# Altium PCB PowerAmplifier_Control.PcbDoc
Units mm, origin at the board's own origin, x right, y up, seen from the top; angles counter-clockwise.
Board outline 99.95 x 150.11 mm, 2 copper layers (Top Layer, Bottom Layer); 61 components, 90 nets, 316 pads, 0 vias.
Unrouted connection lines stored in the file: 173.
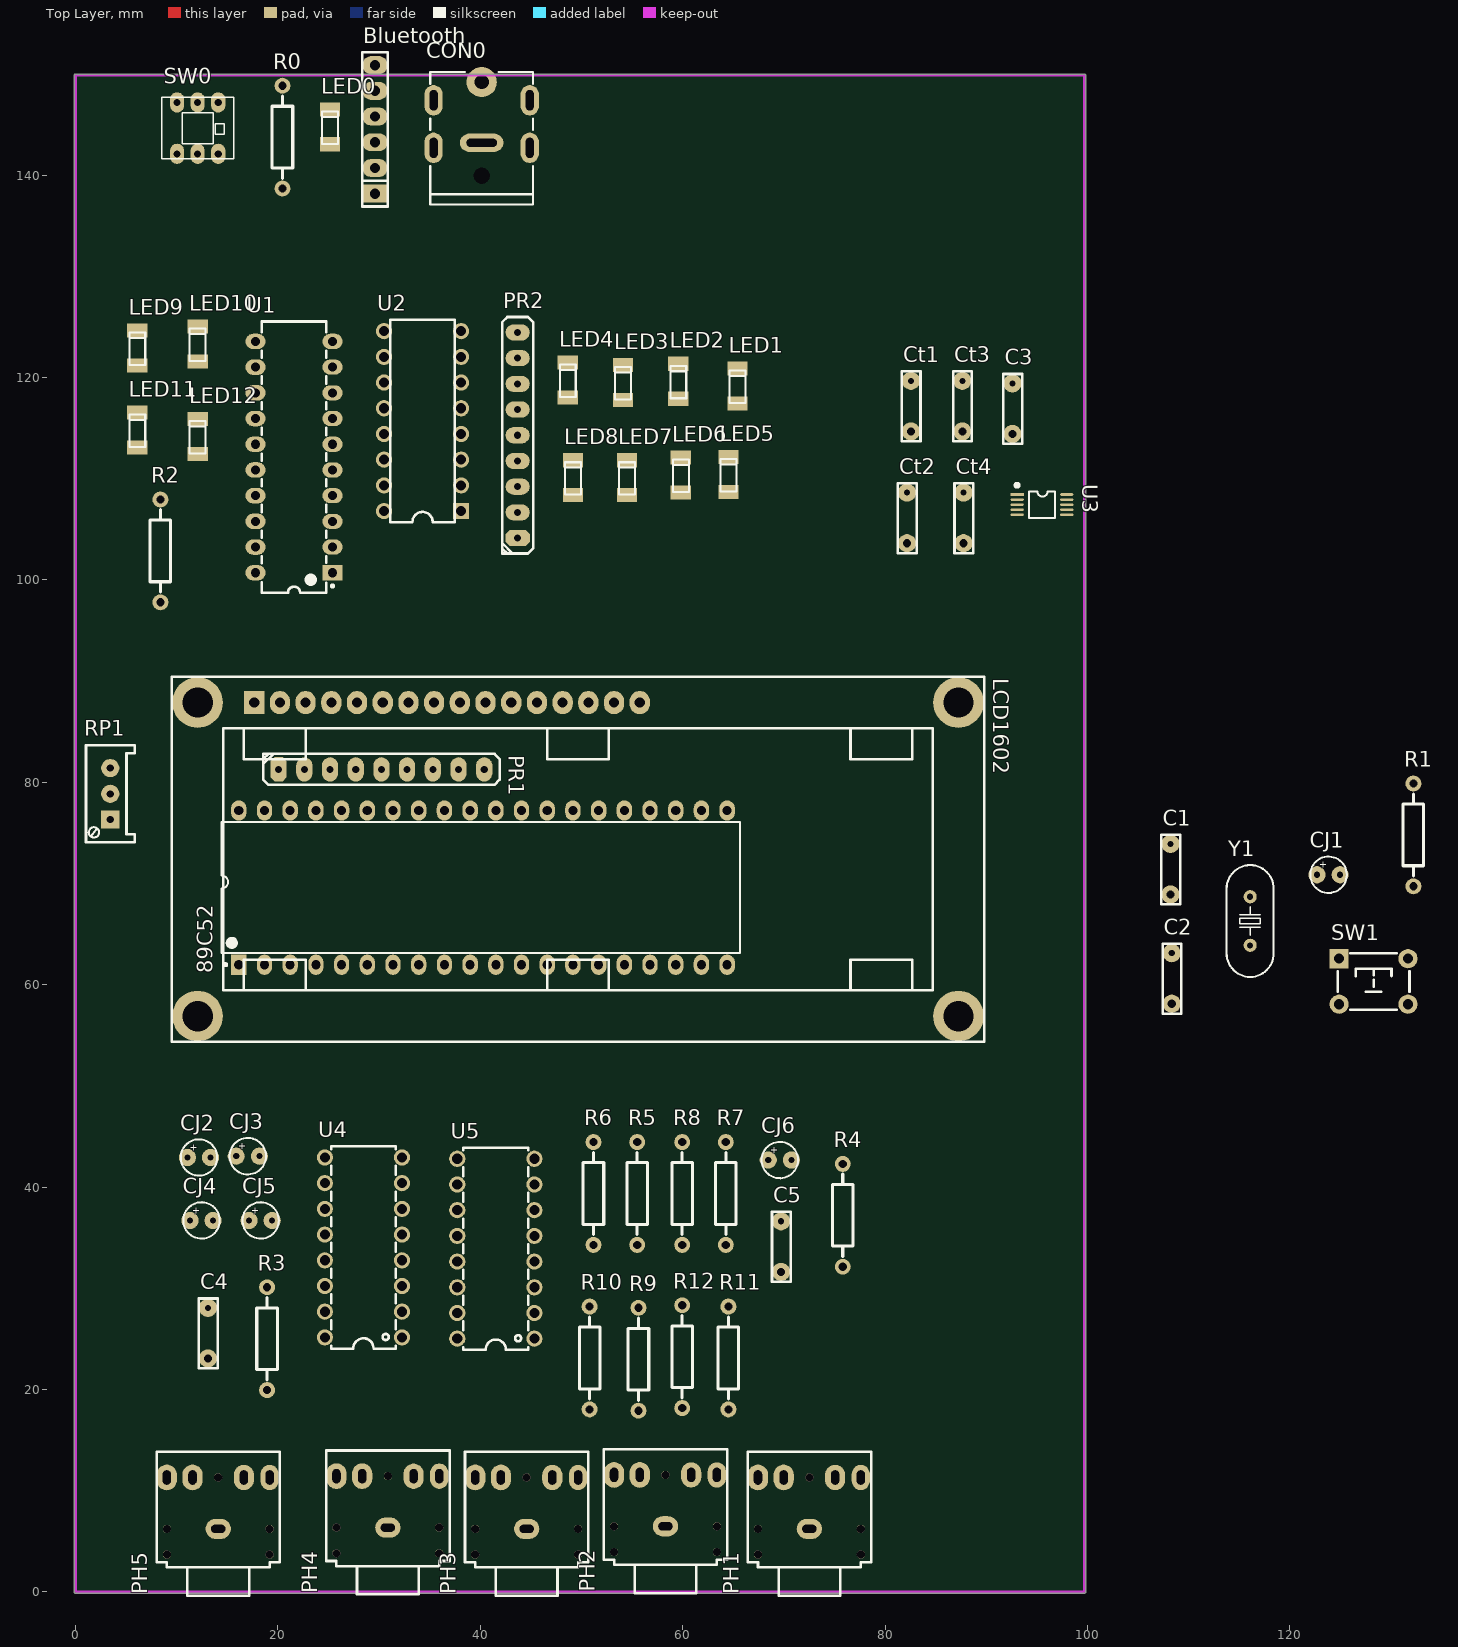
[diagram p0: Top Layer view]
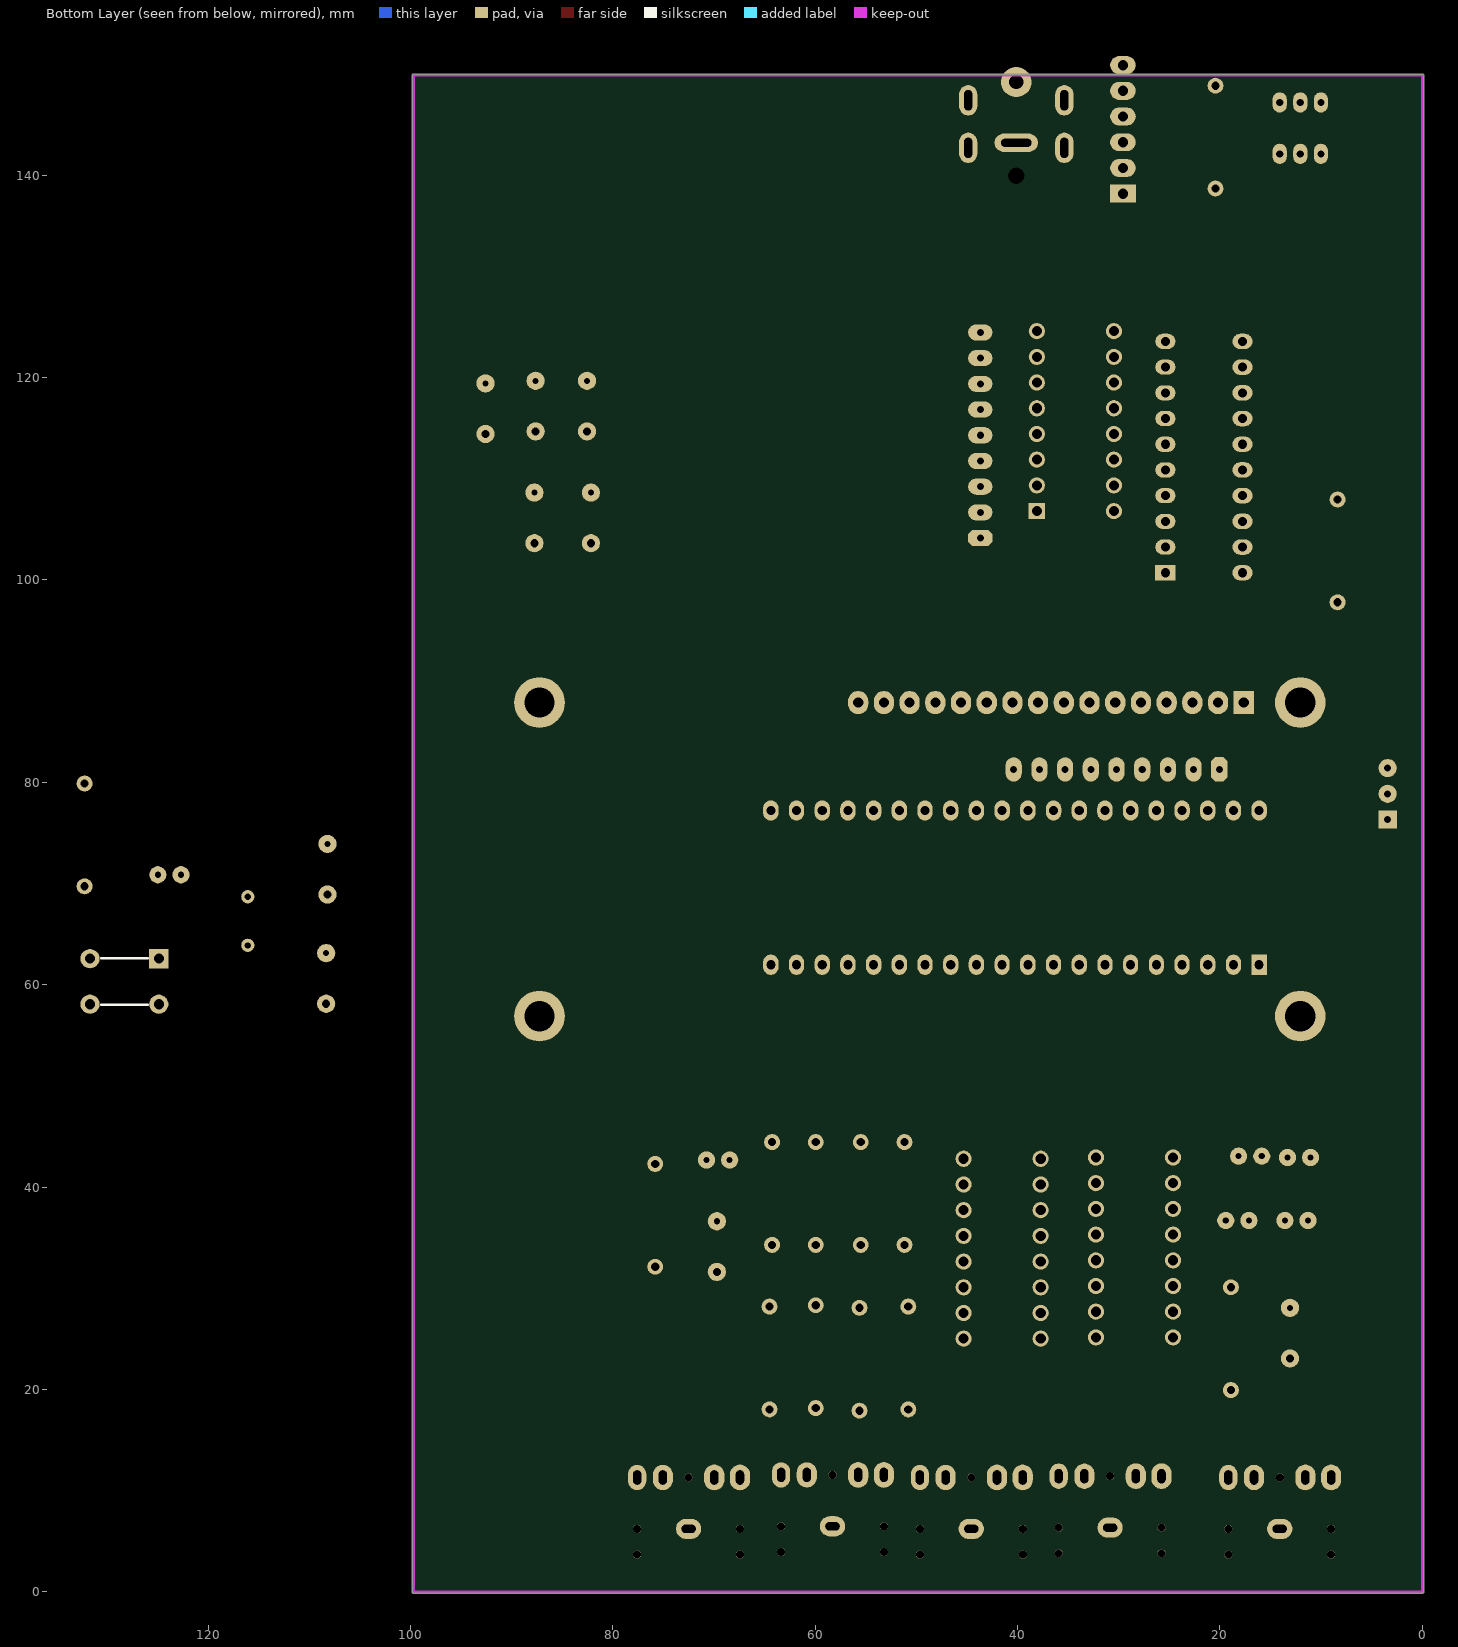
[diagram p1: Bottom Layer view, seen from below]

## Layer stack, top to bottom
Top Solder: solder mask 0.0102, Solder Resist, Dk 3.5
Top Layer: signal copper 0.0356
Dielectric 1: dielectric 0.32, FR-4, Dk 4.8
Bottom Layer: signal copper 0.0356
Bottom Solder: solder mask 0.0102, Solder Resist, Dk 3.5

## Board outline
0,-0.127 cw(c0,0) -0.127,0 -0.127,149.86 cw(c0,149.86) 0,149.987 99.695,149.987 cw(c99.695,149.86) 99.822,149.86 99.822,0 cw(c99.695,0) 99.695,-0.127

## Design rules (kind name [scope] priority, off if disabled: settings)
Clearance [All] p1: gap=0.254
PolygonConnect [All] p1: connectstyle=Relief reliefconductorwidth=0.254 reliefentries=4 polygonreliefangle="90 Angle" airgapwidth=0.254
RoutingVias [All] p1: holewidth=0.711 width=1.27 viastyle="Through Hole" minholewidth=0.711 minwidth=1.27 maxholewidth=0.711 maxwidth=1.27
SolderMaskExpansion [All] p1: expansion=0.102
Width [All] p1: maxlimit=0.254 minlimit=0.254 preferedwidth=0.254
30 further rules are at their usual default settings.

## Components (designator, comment, footprint, x,y, rotation, side; value= is the part's Value field where it differs from the comment)
89C52 "STC89C52RC-40I" DIP-40_LS15.24-L52.58-W13.97-PITCH2.54 40.259,69.596 r90 top
Bluetooth "HEADER1" sip-6 29.591,138.176 r90 top
C1 "30pf" CAP2 108.204,68.914 r90 top
C2 "30pf" CAP2 108.331,58.119 r90 top
C3 "0.1uf" CAP2 92.583,114.427 r90 top
C4 "30pf" CAP2 13.081,23.067 r90 top
C5 "30pf" CAP2 69.723,31.623 r90 top
CJ1 "10uf" CAO1 123.825,70.866 r0 top
CJ2 "22uf" CAO1 12.192,42.926 r0 top
CJ3 "22uf" CAO1 17.018,43.053 r0 top
CJ4 "22uf" CAO1 12.446,36.703 r0 top
CJ5 "22uf" CAO1 18.288,36.703 r0 top
CJ6 "22uf" CAO1 69.596,42.672 r0 top
CON0 "5.5*2.1" DC-005P 40.132,143.704 r0 top
Ct1 "22uf" CAP2 82.55,114.681 r90 top
Ct2 "22uf" CAP2 82.169,103.632 r90 top
Ct3 "22uf" CAP2 87.63,114.681 r90 top
Ct4 "22uf" CAP2 87.757,103.632 r90 top
LCD1602 "1602" 1602 17.653,87.884 r0 top
LED0 "LED_R" LED_1206 25.146,144.78 r90 top
LED1 "LED_R" LED_1206 65.405,119.177 r90 top
LED2 "LED_R" LED_1206 59.563,119.634 r90 top
LED3 "LED_R" LED_1206 54.102,119.507 r90 top
LED4 "LED_R" LED_1206 48.641,119.761 r90 top
LED5 "LED_R" LED_1206 64.516,110.414 r90 top
LED6 "LED_R" LED_1206 59.817,110.363 r90 top
LED7 "LED_R" LED_1206 54.483,110.109 r90 top
LED8 "LED_R" LED_1206 49.149,110.109 r90 top
LED9 "LED_R" LED_1206 6.096,122.936 r90 top
LED10 "LED_R" LED_1206 12.065,123.317 r90 top
LED11 "LED_R" LED_1206 6.096,114.808 r90 top
LED12 "LED_R" LED_1206 12.065,114.173 r90 top
PH1 "POHENJACK STEREO SW" "POHENJACK STEREO SW" 72.39,8.636 r90 top
PH2 "POHENJACK STEREO SW" "POHENJACK STEREO SW" 58.166,8.89 r90 top
PH3 "POHENJACK STEREO SW" "POHENJACK STEREO SW" 44.45,8.636 r90 top
PH4 "POHENJACK STEREO SW" "POHENJACK STEREO SW" 30.734,8.763 r90 top
PH5 "POHENJACK STEREO SW" "POHENJACK STEREO SW" 13.97,8.636 r90 top
PR1 "10k" RP1 20.066,81.28 r0 top
PR2 "1k" RP1 43.688,104.14 r90 top
R0 "10k" AXIAL0.4 20.447,138.684 r90 top
R1 "10k" AXIAL0.4 132.207,69.723 r90 top
R2 "3.3k" AXIAL0.4 8.382,97.79 r90 top
R3 "10k" AXIAL0.4 18.923,19.939 r90 top
R4 "10k" AXIAL0.4 75.819,32.131 r90 top
R5 "51" AXIAL0.4 55.499,34.29 r90 top
R6 "220" AXIAL0.4 51.181,34.29 r90 top
R7 "680" AXIAL0.4 64.262,34.29 r90 top
R8 "1k" AXIAL0.4 59.944,34.29 r90 top
R9 "3.3k" AXIAL0.4 55.626,17.907 r90 top
R10 "6.8k" AXIAL0.4 50.8,18.034 r90 top
R11 "15k" AXIAL0.4 64.516,18.034 r90 top
R12 "27k" AXIAL0.4 59.944,18.161 r90 top
RP1 "10k" 3296W 3.429,78.867 r90 top
SW0 "SW-DPDT" SWH7*7 10.033,147.193 r0 top
SW1 "6x6x5" "TSW DIP-6*6*6" 128.27,60.325 r0 top
U1 "SN74HC573AN" DIP-20_L26.8-W6.4-P2.54-LS7.6-BL 21.59,112.141 r90 top
U2 "SN74HC595N" DIP-16_L19.8-W6.5-P2.54-LS7.6-BL 34.29,115.697 r90 top
U3 "BS814A-1" MSOP10_N 95.504,107.442 r270 top
U4 "CD4051BE" DIP-16_L20.0-W6.4-P2.54-LS7.6-BL 28.448,34.036 r90 top
U5 "CD4051BE" DIP-16_L20.0-W6.4-P2.54-LS7.6-BL 41.529,33.909 r90 top
Y1 "11.0592MHz" "OSC HC-49S" 116.078,66.294 r90 top

## Footprints (in the part's own frame and the unit in brackets; to place one, negate y for a bottom-side part, rotate by r counter-clockwise, add the part's x,y. Pads: shape width x height; smd on the part's side, far side on the other; paste and mask are expansions set on the pad)
1602 [mm]
  round 5 hole 3: 0(-5.588,-30.988) 0(-5.588,0) 0(69.596,-30.988) 0(69.596,0)
  rect 2x2.3 hole 1: 1(0,0)
  oval 2x2.3 hole 1: 2(2.54,0) 3(5.08,0) 4(7.62,0) 5(10.16,0) 6(12.7,0) 7(15.24,0) 8(17.78,0) 9(20.32,0) 10(22.86,0) 11(25.4,0) 12(27.94,0) 13(30.48,0) 14(33.02,0) 15(35.56,0) 16(38.1,0)
  silkscreen extent -8.13,-33.53 72.14,2.54
3296W [mm] "Precise Multi-Winding Adjustable Resistor"
  rect 1.8x1.8 hole 0.7: 1(-2.54,0)
  round 1.8 hole 0.7: 2(0,0) 3(2.54,0)
  silkscreen extent -4.8,-2.4 4.8,2.4, body extent -4.75,-2.4 4.75,2.4, height 11.52
AXIAL0.4 [mil]
  round 62 hole 32: 1(0,0) 2(400,0)
  silkscreen extent 40,-40 360,40
CAO1 [mm]
  round 1.7 hole 0.6: 1(-1.143,0) 2(1.143,0)
  silkscreen extent -1.8,-1.8 1.8,1.8
CAP2 [mm]
  round 1.8 hole 0.8: 1(0,0)
  round 1.8 hole 0.6: 2(5,0)
  silkscreen extent -0.98,-0.95 5.93,0.9
DC-005P [mm] "13mm*10mm*10mm(长*宽*高)"
  oval 1.8x3 hole 0.8 slot 2 at 90 deg unplated: 0(-4.75,-1) 0(-4.75,3.7) 0(4.75,-1) 0(4.75,3.7)
  round 3 hole 1.4 unplated: 1(0,5.5)
  oval 4.3x1.8 hole 0.8 slot 3 at 0 deg unplated: 2(0,-0.5)
  round 0 hole 1.6 unplated: 4(0,-3.75)
  silkscreen extent -5.08,-6.6 5.08,6.48, body extent -5,-6.5 5,6.3, height 10.15
DIP-16_L19.8-W6.5-P2.54-LS7.6-BL [mm]
  rect 1.6x1.6 hole 1: 1(-8.89,-3.81)
  round 1.6 hole 1: 2(-6.35,-3.81) 3(-3.81,-3.81) 4(-1.27,-3.81) 5(1.27,-3.81) 6(3.81,-3.81) 7(6.35,-3.81) 8(8.89,-3.81) 9(8.89,3.81) 10(6.35,3.81) 11(3.81,3.81) 12(1.27,3.81) 13(-1.27,3.81) 14(-3.81,3.81) 15(-6.35,3.81) 16(-8.89,3.81)
  silkscreen extent -10,-3.2 10,3.2
DIP-16_L20.0-W6.4-P2.54-LS7.6-BL [mm]
  round 1.6 hole 1: 1(-8.89,-3.81) 2(-6.35,-3.81) 3(-3.81,-3.81) 4(-1.27,-3.81) 5(1.27,-3.81) 6(3.81,-3.81) 7(6.35,-3.81) 8(8.89,-3.81) 9(8.89,3.81) 10(6.35,3.81) 11(3.81,3.81) 12(1.27,3.81) 13(-1.27,3.81) 14(-3.81,3.81) 15(-6.35,3.81) 16(-8.89,3.81)
  silkscreen extent -10,-3.2 10,3.2
DIP-20_L26.8-W6.4-P2.54-LS7.6-BL [mm]
  rect 1.5x2 hole 0.9: 1(-11.43,-3.81)
  oval 1.5x1.999 hole 0.9: 2(-8.89,-3.81) 3(-6.35,-3.81) 4(-3.81,-3.81) 5(-1.27,-3.81) 6(1.27,-3.81) 7(3.81,-3.81) 8(6.35,-3.81) 9(8.89,-3.81)
  oval 1.524x2 hole 0.9: 10(11.43,-3.81) 11(11.43,3.81) 12(8.89,3.81) 13(6.35,3.81) 14(3.81,3.81) 15(1.27,3.81) 16(-1.27,3.81) 17(-3.81,3.81) 18(-6.35,3.81) 19(-8.89,3.81) 20(-11.43,3.81)
  silkscreen extent -13.4,-3.93 13.4,3.2
DIP-40_LS15.24-L52.58-W13.97-PITCH2.54 [mm]
  rect 2x1.5 hole 0.9: 1(-7.62,24.13)
  oval 1.999x1.5 hole 0.9: 2(-7.62,21.59) 3(-7.62,19.05) 4(-7.62,16.51) 5(-7.62,13.97) 6(-7.62,11.43) 7(-7.62,8.89) 8(-7.62,6.35) 9(-7.62,3.81) 11(-7.62,-1.27)
  oval 2x1.524 hole 0.9: 10(-7.62,1.27) 12(-7.62,-3.81) 13(-7.62,-6.35) 14(-7.62,-8.89) 15(-7.62,-11.43) 16(-7.62,-13.97) 17(-7.62,-16.51) 18(-7.62,-19.05) 19(-7.62,-21.59) 20(-7.62,-24.13) 21(7.62,-24.13) 22(7.62,-21.59) 23(7.62,-19.05) 24(7.62,-16.51) 25(7.62,-13.97) 26(7.62,-11.43) 27(7.62,-8.89) 28(7.62,-6.35) 29(7.62,-3.81) 30(7.62,-1.27) 31(7.62,1.27) 32(7.62,3.81) 33(7.62,6.35) 34(7.62,8.89) 35(7.62,11.43) 36(7.62,13.97) 37(7.62,16.51) 38(7.62,19.05) 39(7.62,21.59) 40(7.62,24.13)
  silkscreen extent -7.74,-25.42 6.48,25.82
LED_1206 [mm]
  rect 1.4x2 smd: 1(-1.727,0) 2(1.727,0)
  silkscreen extent -1.68,-0.79 1.52,0.79, body extent -1.65,-0.79 1.55,0.81, height 1.11
MSOP10_N [mm] "塑封体长3mm，宽3mm，脚距0.5"
  rect 0.26x1.3 smd: 1(-1,-2.45)
  oval 0.26x1.3 smd: 2(-0.5,-2.45) 3(0,-2.45) 4(0.5,-2.45) 5(1,-2.45) 6(1,2.45) 7(0.5,2.45) 8(0,2.45) 9(-0.5,2.45) 10(-1,2.45)
  silkscreen extent -2.07,-2.6 1.3,1.3, body extent -1.5,-2.45 1.5,2.45, height 0.95
"OSC HC-49S" [mm]
  round 1.3 hole 0.6: 1(-2.4,0) 2(2.4,0)
  silkscreen extent -5.52,-2.32 5.52,2.33, body extent -5.52,-2.32 5.53,2.33, height 4.13
"POHENJACK STEREO SW" [mm]
  oval 2.54x2 hole 0.8 slot 1.4 at 0 deg: 1(2.667,4.953) 2(2.667,2.413)
  oval 2.5x2 hole 0.8 slot 1.4 at 0 deg: 3(2.667,-2.667)
  oval 2.5x1.8 hole 0.8 slot 1.4 at 0 deg: 4(2.667,-5.207)
  oval 2x2.5 hole 0.8 slot 1.4 at 90 deg: 5(-2.413,-0.127)
  round 0.8 hole 0.8: 6(-4.953,-5.207) 6(-4.953,4.953) 6(-2.413,4.953) 6(-2.413,-5.207) 6(2.667,-0.127)
  silkscreen extent -9.02,-6.22 5.21,5.97
RP1 [mm]
  oct 1.6x2.4 hole 0.7: 1(0,0)
  oval 1.6x2.4 hole 0.7: 2(2.54,0) 3(5.08,0) 4(7.62,0) 5(10.16,0) 6(12.7,0) 7(15.24,0) 8(17.78,0) 9(20.32,0)
  silkscreen extent -1.52,-1.52 21.84,1.52
sip-6 [mil]
  rect 70x100 hole 40: 1(0,0)
  oval 70x100 hole 40: 2(100,0) 3(200,0) 4(300,0) 5(400,0) 6(500,0)
  silkscreen extent -50,-50 550,50
SWH7*7 [mm]
  oval 1.4x2 hole 0.7: 1(0,0) 2(2.032,0) 3(4.064,0) 4(4.064,-5.08) 5(2.032,-5.08) 6(0,-5.08)
  silkscreen extent -1.52,-5.59 5.59,0.51
"TSW DIP-6*6*6" [mm] "6*6*6mm"
  rect 1.9x1.9 hole 1: 1(-3.4,2.25)
  round 1.9 hole 1: 2(-3.4,-2.25) 3(3.4,-2.25) 4(3.4,2.25)
  silkscreen extent -3.56,-2.79 3.56,2.79, body extent -4.11,-3 4.11,3, height 5.95

## Part data
Bluetooth: library part CON6, "Connector"
C1 C2 C3 C4 C5 Ct1 Ct2 Ct3 Ct4: library part CAP1
CJ1 CJ2 CJ3 CJ4 CJ5 CJ6: library part CAP3
CON0: library part DC-005P, "带屏蔽DC电源接口"
LED0 LED1 LED2 LED3 LED4 LED5 LED6 LED7 LED8 LED9 LED10 LED11 LED12: library part LED
PR1 PR2: library part PRES1
R0 R1 R2 R3 R4 R5 R6 R7 R8 R9 R10 R11 R12: library part R, "贴片电阻"
RP1: library part RP-ID, "插件单联电位器"
SW1: library part "TSW DIP-6x6", "直插6x6轻触开关"
U3: library part BS814A, "4键电容触摸按键芯片"
Y1: library part XTAL-2P, "2脚无源脚晶振"

## Nets (pads, with @x,y where several pads share a name; then routed paths per layer and width w, separated by ;. In a path a pad name is that pad's centre, name@x,y a point inside that pad or via, vN(x,y) a via of type N, cw(c..) or ccw(c..) an arc to the next point about the centre after c; other vN are vias at no path point)
+5V: CON0.1 SW0.5
DS: U1.12 U2.14
EN: Bluetooth.6
GND: 89C52.20 Bluetooth.4 C1.2 C2.2 C3.1 C4.2 C5.2 CON0.0 CON0.2 Ct1.2 Ct2.2 Ct3.2 Ct4.2 LCD1602.1 LCD1602.16 LED0.2 PH1.5 PH2.5 PH3.5 PH4.5 PH5.5 R1.1 R3.1 R4.1 RP1.1 U1.1 U1.10 U2.8 U3.10 U4.6 U4.7 U4.8 U5.6 U5.7 U5.8
IN0: CJ2.1 PH1.1 PH1.4
IN1: CJ5.1 PH2.1 PH2.4
IN2: CJ4.1 PH3.1 PH3.4
IN3: CJ3.1 PH4.1 PH4.4
IO2.0: R5.1 U5.13
IO2.1: R6.1 U5.14
IO2.2: R7.1 U5.15
IO2.3: R8.1 U5.12
IO2.4: R9.1 U5.1
IO2.5: R10.1 U5.5
IO2.6: R11.1 U5.2
IO2.7: R12.1 U5.4
L1: LED1.2 U2.15
Net89C52_9: 89C52.9 CJ1.2 R1.2 SW1.4
Net89C52_18: 89C52.18 C2.1 Y1.1
Net89C52_19: 89C52.19 C1.1 Y1.2
NetCJ2_2: CJ2.2 U4.12
NetCJ3_2: CJ3.2 U4.13
NetCJ4_2: CJ4.2 U4.14
NetCJ5_2: CJ5.2 U4.15
NetCJ6_2: CJ6.2 R5.2 R6.2 R7.2 R8.2 R9.2 R10.2 R11.2 R12.2
NetLCD1602_3: LCD1602.3 RP1.2
NetLED0_1: LED0.1 R0.1
NetLED1_1: LED1.1 PR2.2
NetLED2_1: LED2.1 PR2.3
NetLED2_2: LED2.2 U2.1
NetLED3_1: LED3.1 PR2.4
NetLED3_2: LED3.2 U2.2
NetLED4_1: LED4.1 PR2.5
NetLED4_2: LED4.2 U2.3
NetLED5_1: LED5.1 PR2.6
NetLED5_2: LED5.2 U2.4
NetLED6_1: LED6.1 PR2.7
NetLED6_2: LED6.2 U2.5
NetLED7_1: LED7.1 PR2.8
NetLED7_2: LED7.2 U2.6
NetLED8_1: LED8.1 PR2.9
NetLED8_2: LED8.2 U2.7
NetLED9_1: LED9.1 LED10.1 LED11.1 LED12.1 R2.1
NetLED9_2: LED9.2 U1.19
NetLED10_2: LED10.2 U1.18
NetLED11_2: LED11.2 U1.17
NetLED12_2: LED12.2 U1.16
OE: U1.13 U2.13
OUT: C5.1 PH5.1 PH5.4 R4.2 U5.3
P0.0: 89C52.39 LCD1602.7 PR1.2 U1.2
P0.1: 89C52.38 LCD1602.8 PR1.3 U1.3
P0.2: 89C52.37 LCD1602.9 PR1.4 U1.4
P0.3: 89C52.36 LCD1602.10 PR1.5 U1.5
P0.4: 89C52.35 LCD1602.11 PR1.6 U1.6
P0.5: 89C52.34 LCD1602.12 PR1.7 U1.7
P0.6: 89C52.33 LCD1602.13 PR1.8 U1.8
P0.7: 89C52.32 LCD1602.14 PR1.9 U1.9
P1.0: 89C52.1 U1.11
P1.1: 89C52.2 LCD1602.4
P1.2: 89C52.3 LCD1602.5
P1.3: 89C52.4 LCD1602.6
P1.4: 89C52.5 U3.9
P1.5: 89C52.6 U3.8
P1.6: 89C52.7 U3.7
P1.7: 89C52.8 U3.6
P2.0: 89C52.21
P2.1: 89C52.22 U4.9
P2.2: 89C52.23 U4.10
P2.3: 89C52.24 U4.11
P2.4: 89C52.25
P2.5: 89C52.26 U5.9
P2.6: 89C52.27 U5.10
P2.7: 89C52.28 U5.11
P3.2: 89C52.12
P3.3: 89C52.13
P3.4: 89C52.14
P3.5: 89C52.15
P3.6: 89C52.16
P3.7: 89C52.17
RXD: 89C52.10 Bluetooth.3
SHCP: U1.15 U2.11
STATE: Bluetooth.1
STCP: U1.14 U2.12
TOU5: C4.1 CJ6.1 R3.2 U4.3
TOUCH1: Ct1.1 U3.2
TOUCH2: Ct2.1 U3.3
TOUCH3: Ct3.1 U3.4
TOUCH4: Ct4.1 U3.5
TXD: 89C52.11 Bluetooth.2
VCC: 89C52.31 89C52.40 Bluetooth.5 C3.2 CJ1.1 LCD1602.2 LCD1602.15 PR1.1 PR2.1 R0.2 R2.2 RP1.3 SW0.4 SW1.3 U1.20 U2.10 U2.16 U3.1 U4.16 U5.16
pads on no net: 89C52.29 89C52.30 CON0.4 LCD1602.0 PH1.2 PH1.3 PH1.6 PH2.2 PH2.3 PH2.6 PH3.2 PH3.3 PH3.6 PH4.2 PH4.3 PH4.6 PH5.2 PH5.3 PH5.6 SW0.1 SW0.2 SW0.3 SW0.6 SW1.1 SW1.2 U2.9 U4.1 U4.2 U4.4 U4.5

## Keep-outs
Keep-Out Layer:
  lines w0.254: 0,99.695 0,0 ; 0,0 99.695,0 99.695,149.86 0,149.86 ; 0,0 0,149.86 ; 0,0 0,149.86

## Text inside footprints (layer, text, board x,y; h text height)
CJ1: Top Overlay "+" at 122.9,71.541 h0.7
CJ2: Top Overlay "+" at 11.267,43.601 h0.7
CJ3: Top Overlay "+" at 16.093,43.728 h0.7
CJ4: Top Overlay "+" at 11.521,37.378 h0.7
CJ5: Top Overlay "+" at 17.363,37.378 h0.7
CJ6: Top Overlay "+" at 68.671,43.347 h0.7